# EAGLE board board (EAGLE 9.3.2)

No outline drawn. Coordinates in mm, seen from the top.
Copper layers (1*16): Top 0.035mm / dielectric 1.5mm / Bottom 0.035mm
Design rules "default": minimum track width 6mil, minimum drill 0.35mm, track to track 6mil, track to pad 6mil, pad to pad 6mil, via to via 6mil, smd to smd 6mil, copper to edge 40mil, drill to drill 6mil, minimum pad ring 10mil, minimum via ring 8mil, stop-mask expansion 4mil, vias tented up to drill 0mil, thermal gap 10mil

## Footprints (pad centres in the part's own frame; a part is rotated, then mirrored left to right if it is on the bottom)
MA04-1 = drill 1.016 long: 1 -3.81,0; 2 -1.27,0; 3 1.27,0; 4 3.81,0
C050-024X044 = drill 0.813 octagon: 1 -2.54,0; 2 2.54,0
D-5 = drill 0.813 octagon: A 2.54,0; C -2.54,0
MA04-2 = drill 1.016 octagon: 1 -3.81,-1.27; 2 -3.81,1.27; 3 -1.27,-1.27; 4 -1.27,1.27; 5 1.27,-1.27; 6 1.27,1.27; 7 3.81,-1.27; 8 3.81,1.27
MULTIWATT-15 = drill 1.2 long: 1 -8.89,-7.62; 2 -7.62,-2.54; 3 -6.35,-7.62; 4 -5.08,-2.54; 5 -3.81,-7.62; 6 -2.54,-2.54; 7 -1.27,-7.62; 8 0,-2.54; 9 1.27,-7.62; 10 2.54,-2.54; 11 3.81,-7.62; 12 5.08,-2.54; 13 6.35,-7.62; 14 7.62,-2.54; 15 8.89,-7.62
MEGA_ARDUINO_1 = drill 1.016 long: 1 33.02,2.54; 2 35.56,2.54; 3 38.1,2.54; 4 40.64,2.54; 5 43.18,2.54; 6 45.72,2.54; 7 50.8,2.54; 8 53.34,2.54; 9 55.88,2.54; 10 58.42,2.54; 11 60.96,2.54; 12 63.5,2.54; 13 66.04,2.54; 14 68.58,2.54; 15 73.66,2.54; 16 76.2,2.54; 17 78.74,2.54; 18 81.28,2.54; 19 83.82,2.54; 20 86.36,2.54; 21 88.9,2.54; 22 91.44,2.54; 23 86.36,50.8; 24 83.82,50.8; 25 81.28,50.8; 26 78.74,50.8; 27 76.2,50.8; 28 73.66,50.8; 29 71.12,50.8; 30 68.58,50.8; 31 63.5,50.8; 32 60.96,50.8; 33 58.42,50.8; 34 55.88,50.8; 35 53.34,50.8; 36 50.8,50.8; 37 48.26,50.8; 38 45.72,50.8; 39 41.91,50.8; 40 39.37,50.8; 41 36.83,50.8; 42 34.29,50.8; 43 31.75,50.8; 44 29.21,50.8; 45 26.67,50.8; 46 24.13,50.8 | drill 1.016 octagon: 47 93.98,50.8; 48 96.52,50.8; 49 93.98,48.26; 50 96.52,48.26; 51 93.98,45.72; 52 96.52,45.72; 53 93.98,43.18; 54 96.52,43.18; 55 93.98,40.64; 56 96.52,40.64; 57 93.98,38.1; 58 96.52,38.1; 59 93.98,35.56; 60 96.52,35.56; 61 93.98,33.02; 62 96.52,33.02; 63 93.98,30.48; 64 96.52,30.48; 65 93.98,27.94; 66 96.52,27.94; 67 93.98,25.4; 68 96.52,25.4; 69 93.98,22.86; 70 96.52,22.86; 71 93.98,20.32; 72 96.52,20.32; 73 93.98,17.78; 74 96.52,17.78; 75 93.98,15.24; 76 96.52,15.24; 77 93.98,12.7; 78 96.52,12.7; 79 93.98,10.16; 80 96.52,10.16; 81 93.98,7.62; 82 96.52,7.62 | hole 3.2: 15.24,50.8; 15.24,2.54; 90.17,50.8; 96.52,2.54 | hole 2: 74.168,27.94
SPC4077 = drill 0.8 pad 2.184 long: 1 -3,0; 2 0,-4.8 | drill 1 pad 2.184 long: 3 3,0
1X02 = drill 1.016 long: 1 -1.27,0; 2 1.27,0
0204/7 = drill 0.813 octagon: 1 -3.81,0; 2 3.81,0
MA03-1 = drill 1.016 long: 1 -2.54,0; 2 0,0; 3 2.54,0

## Placement (x,y rotation side)
BLUETOOTH_MODULE  [MA04-1]  52.07,13.97 0 top
C1  100nF  [C050-024X044]  34.29,85.09 0 top
C2  100nF  [C050-024X044]  34.29,78.74 0 top
D1  [D-5]  38.1,72.39 0 top
D2  [D-5]  45.72,72.39 0 top
D3  [D-5]  54.61,72.39 0 top
D4  [D-5]  63.5,72.39 0 top
D5  [D-5]  63.5,66.04 0 top
D6  [D-5]  54.61,66.04 0 top
D7  [D-5]  45.72,66.04 0 top
D8  [D-5]  38.1,66.04 0 top
ESP8266  [MA04-2]  52.07,44.45 180 top
IC1  L298  [MULTIWATT-15]  52.07,87.63 0 top
IC2  [MEGA_ARDUINO_1]  24.13,100.33 270 top
J3  [SPC4077]  36.83,93.98 0 top
LIFI1  [MA04-1]  39.37,38.1 0 top
LIFI2  [MA04-1]  39.37,45.72 0 top
LIFI3  [MA04-1]  39.37,53.34 0 top
LIFI4  [MA04-1]  39.37,60.96 0 top
LIMIT_SW1  [1X02]  62.23,19.05 0 top
LIMIT_SW2  [1X02]  62.23,27.94 0 top
MOTOR1  [1X02]  67.31,88.9 0 top
MOTOR2  [1X02]  67.31,81.28 0 top
NRF  [MA04-2]  52.07,31.75 0 top
R1  1k  [0204/7]  52.07,50.8 0 top
R2  2k2  [0204/7]  52.07,57.15 0 top
SENSOR1  [MA03-1]  40.64,19.05 0 top
SENSOR2  [MA03-1]  40.64,26.67 0 top
SERIAL1  [MA03-1]  62.23,38.1 0 top
SERIAL2  [MA03-1]  62.23,46.99 0 top
SERIAL3  [MA03-1]  62.23,55.88 0 top

## Library data of the parts
BLUETOOTH_MODULE ESP8266 LIFI1-LIFI4 NRF SENSOR1 SENSOR2 SERIAL1-SERIAL3 = con-lstb; OC_FARNELL: unknown; OC_NEWARK: unknown
C1 C2 = rcl
D1-D8 = diode
IC1 = st-microelectronics; MPN: L298N; OC_FARNELL: 1589425; OC_NEWARK: 32M1527
IC2 = arduino
J3 = con-jack; OC_FARNELL: unknown; OC_NEWARK: unknown
LIMIT_SW1 LIMIT_SW2 MOTOR1 MOTOR2 = pinhead
R1 R2 = rcl; SPICEPREFIX: R

## Nets
2: IC2.33 SENSOR1.1
3: IC2.34 SENSOR2.1
3V3: ESP8266.2 ESP8266.6 IC2.2 NRF.7
4: IC1.6 IC2.35
5: IC1.11 IC2.36
5V: BLUETOOTH_MODULE.4 C1.1 IC1.9 IC2.3 IC2.47 IC2.48 LIFI1.1 LIFI2.1 LIFI3.1 LIFI4.1 SENSOR1.3 SENSOR2.3
6: IC1.5 IC2.37
7: IC2.38 NRF.6
8: IC2.39 NRF.5
9: IC1.7 IC2.40
10: IC1.10 IC2.41
11: IC1.12 IC2.42
22: IC2.49 LIFI1.4
24: IC2.51 LIFI2.4
26: IC2.53 LIFI3.4
28: IC2.55 LIFI4.4
30: IC2.57 LIMIT_SW1.1
32: IC2.59 LIMIT_SW2.1
A0: IC2.7 LIFI1.3
A1: IC2.8 LIFI2.3
A2: IC2.9 LIFI3.3
A3: IC2.10 LIFI4.3
GND: BLUETOOTH_MODULE.3 C1.2 C2.2 D2.A D4.A D7.A D8.A ESP8266.3 ESP8266.7 IC1.1 IC1.8 IC1.15 IC2.4 IC2.5 IC2.45 IC2.81 IC2.82 J3.1 J3.2 LIFI1.2 LIFI2.2 LIFI3.2 LIFI4.2 LIMIT_SW1.2 LIMIT_SW2.2 NRF.8 R2.2 SENSOR1.2 SENSOR2.2 SERIAL1.1 SERIAL2.1 SERIAL3.1
MISO: IC2.77 NRF.2
MOSI: IC2.78 NRF.3
N$1: D1.A D2.C IC1.2 MOTOR1.1
N$2: D3.A D4.C IC1.3 MOTOR1.2
N$3: D6.A D8.C IC1.14 MOTOR2.2
N$4: D5.A D7.C IC1.13 MOTOR2.1
N$5: ESP8266.1 R1.1
N$17: IC2.43
N$18: IC2.44
N$22: NRF.1
N$30: IC2.31
N$31: IC2.32
R1: IC2.25 R1.2 R2.1 SERIAL1.2
R2: BLUETOOTH_MODULE.2 IC2.27 SERIAL2.2
R3: IC2.29 SERIAL3.2
SCK: IC2.79 NRF.4
SS: IC2.80
T1: ESP8266.8 IC2.26 SERIAL1.3
T2: BLUETOOTH_MODULE.1 IC2.28 SERIAL2.3
T3: IC2.30 SERIAL3.3
VIN: C2.1 D1.C D3.C D5.C D6.C IC1.4 IC2.6 J3.3

## Tracks (layer width: path | path; a pad name or v marks a point on that pad's centre or on a via)
2  (1 unrouted)
3  (1 unrouted)
3V3  (3 unrouted)
4  (1 unrouted)
5  (1 unrouted)
5V  (11 unrouted)
6  (1 unrouted)
7  (1 unrouted)
8  (1 unrouted)
9  (1 unrouted)
10  (1 unrouted)
11  (1 unrouted)
22  (1 unrouted)
24  (1 unrouted)
26  (1 unrouted)
28  (1 unrouted)
30  (1 unrouted)
32  (1 unrouted)
A0  (1 unrouted)
A1  (1 unrouted)
A2  (1 unrouted)
A3  (1 unrouted)
GND  (31 unrouted)
MISO  (1 unrouted)
MOSI  (1 unrouted)
N$1  (3 unrouted)
N$2  (3 unrouted)
N$3  (3 unrouted)
N$4  (3 unrouted)
N$5  (1 unrouted)
R1  (3 unrouted)
R2  (2 unrouted)
R3  (1 unrouted)
SCK  (1 unrouted)
T1  (2 unrouted)
T2  (2 unrouted)
T3  (1 unrouted)
VIN  (7 unrouted)